# EAGLE board marquee (EAGLE 9.3.0)
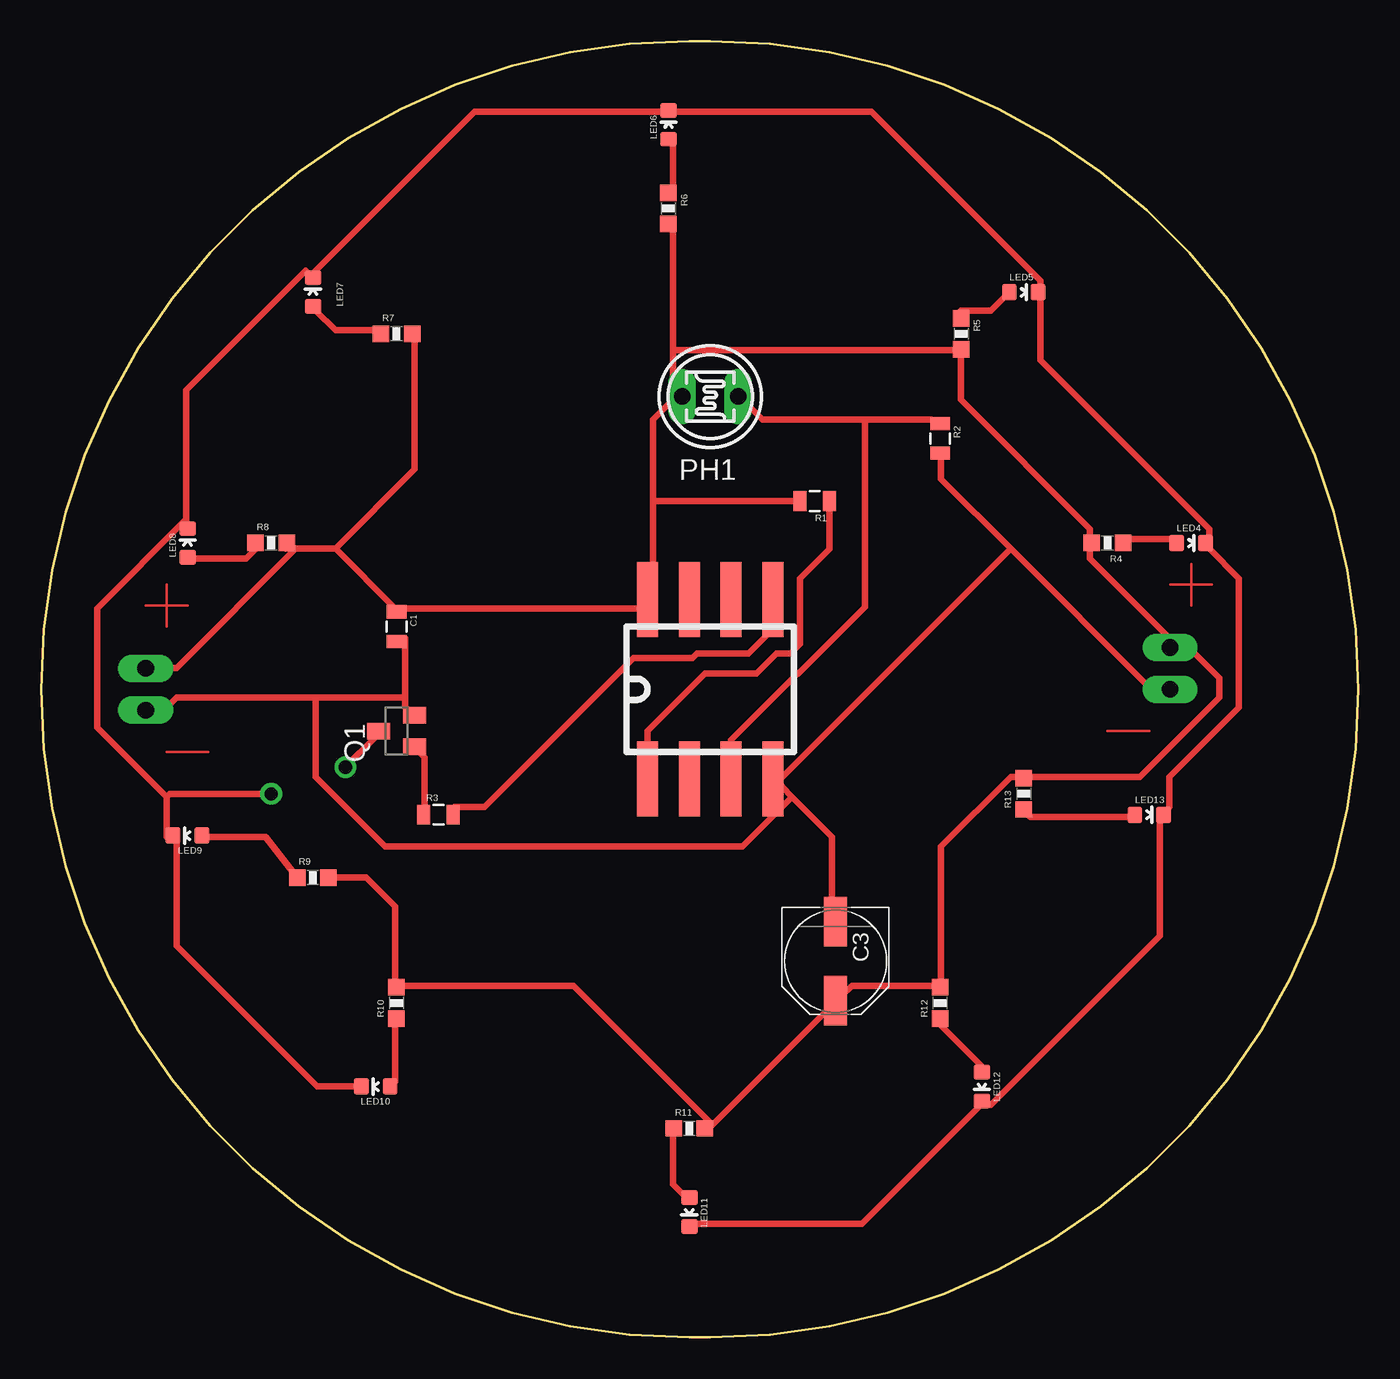
[diagram p0: board, top side]
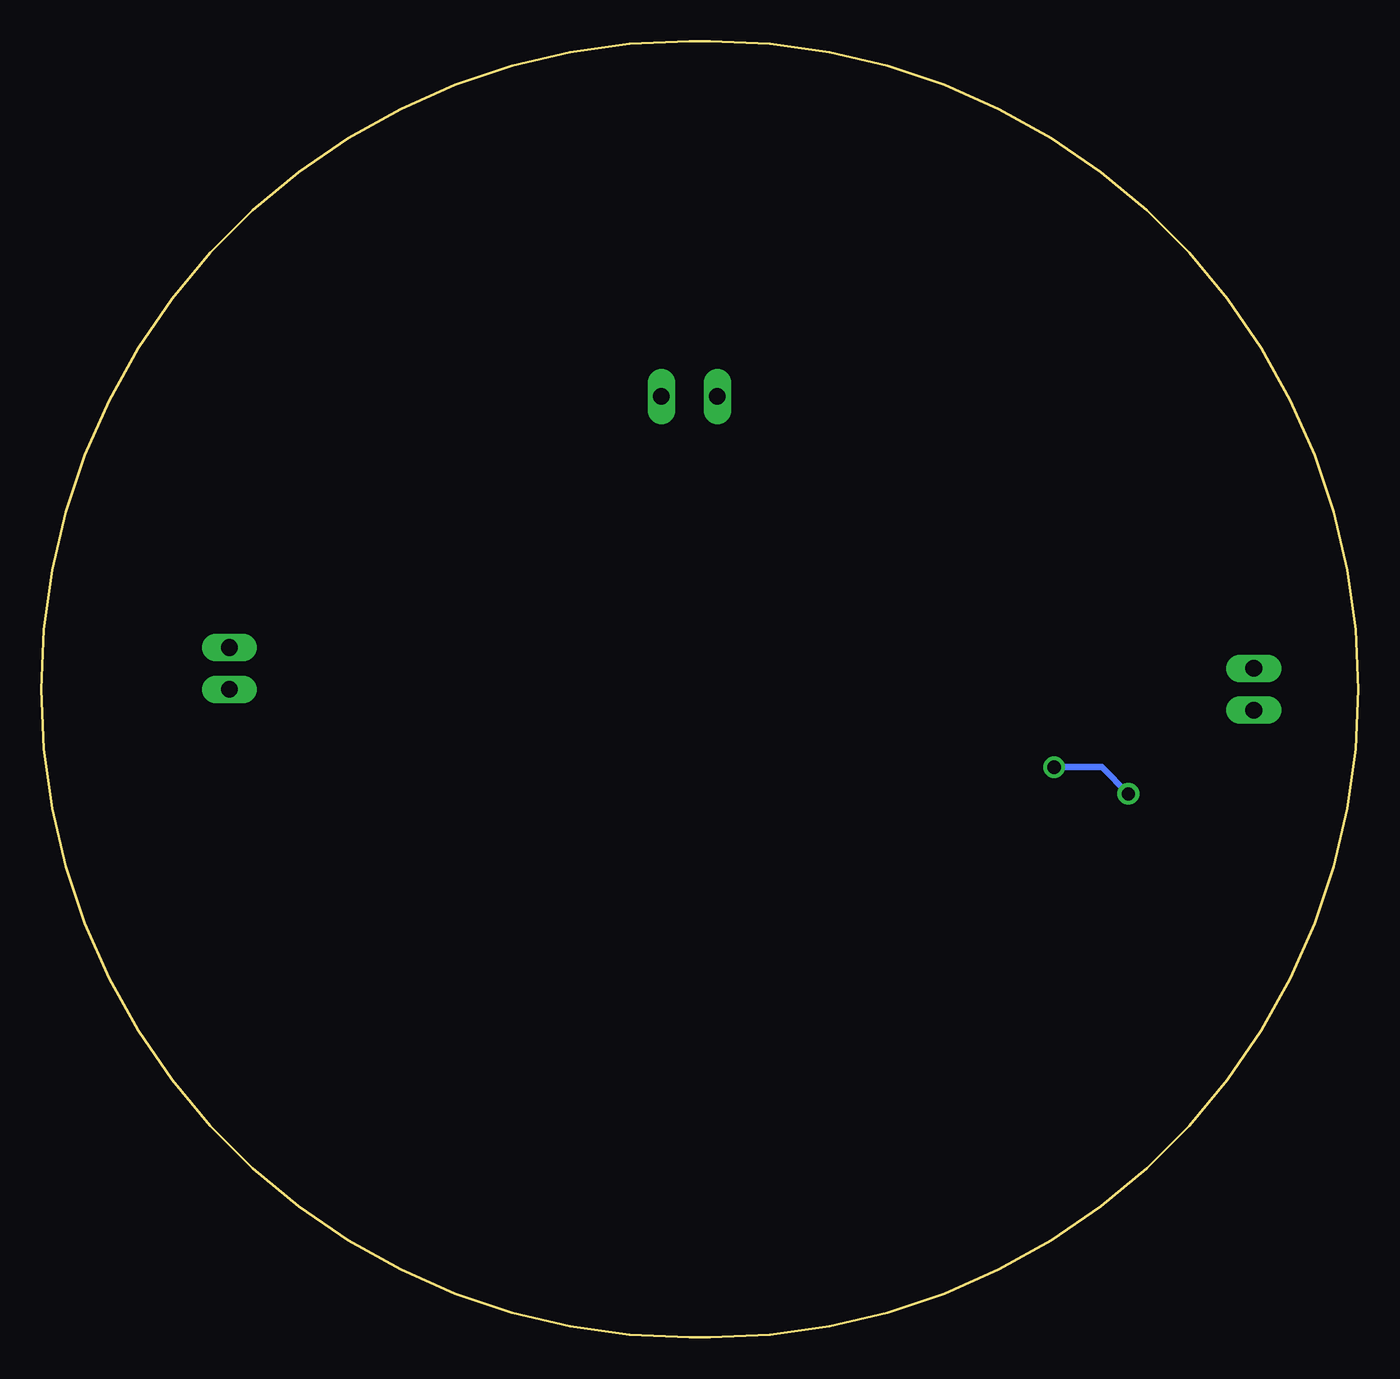
[diagram p1: board, bottom side, seen from below]

Size 80.01 x 78.74 mm. Coordinates in mm from the lower left corner, seen from the top.
Outline: 0,39.37 arc-90 39.37,78.74 40.64,78.74 arc-90 80.01,39.37 arc-90 40.64,0 39.37,0 arc-90 0,39.37
Copper layers (1*16): Top 0.035mm / dielectric 1.5mm / Bottom 0.035mm
Design rules "default": minimum track width 16mil, minimum drill 0.8mm, track to track 0.8mm, track to pad 0.8mm, pad to pad 0.8mm, via to via 0.8mm, smd to smd 0mil, copper to edge 1mil, drill to drill 1mil, minimum pad ring 10mil, minimum via ring 10mil, stop-mask expansion 1mil, vias tented up to drill 30mil, thermal gap 10mil

## Footprints (pad centres in the part's own frame; a part is rotated, then mirrored left to right if it is on the bottom)
0805 = smd 0.8 x 1.2: 1 -0.9,0; 2 0.9,0
PANASONIC_D = smd 3 x 1.4: + 2.4,0; - -2.4,0
LED-0603 = smd 1 x 0.9: A 0,-0.877; C 0,0.877
PHOTOCELL_ADAFRUIT = drill 1 pad 1.676 long: 1 -1.7,0; 2 1.7,0
SOT23 = smd 1 x 1.4: 1 -0.95,-1.1; 2 0.95,-1.1; 3 0,1.1
0603-RES = smd 1 x 1: 1 -0.95,0; 2 0.95,0
SOCKET-8PIN-BENT = smd 4.54 x 1.27: 1 -5.445,3.81; 2 -5.445,1.27; 3 -5.445,-1.27; 4 -5.445,-3.81; 5 5.445,-3.81; 6 5.445,-1.27; 7 5.445,1.27; 8 5.445,3.81
HEADER-2 = drill 1.016 pad 1.676 long: 1 0,0; 2 0,2.54

## Placement (x,y rotation side)
C1  0.1uF  [0805]  21.59,43.18 270 top
C3  100uf  [PANASONIC_D]  48.26,22.86 270 top
LED4  [LED-0603]  69.85,48.26 270 top
LED5  [LED-0603]  59.69,63.5 270 top
LED6  [LED-0603]  38.1,73.66 0 top
LED7  [LED-0603]  16.51,63.5 0 top
LED8  [LED-0603]  8.89,48.26 0 top
LED9  [LED-0603]  8.89,30.48 90 top
LED10  [LED-0603]  20.32,15.24 90 top
LED11  [LED-0603]  39.37,7.62 180 top
LED12  [LED-0603]  57.15,15.24 180 top
LED13  [LED-0603]  67.31,31.75 270 top
PH1  PHOTOCELL  [PHOTOCELL_ADAFRUIT]  40.64,57.15 0 top
Q1  [SOT23]  21.59,36.83 90 top
R1  10k  [0805]  46.99,50.8 180 top
R2  10k  [0805]  54.61,54.61 270 top
R3  150  [0805]  24.13,31.75 0 top
R4  150  [0603-RES]  64.77,48.26 180 top
R5  150  [0603-RES]  55.88,60.96 270 top
R6  150  [0603-RES]  38.1,68.58 270 top
R7  150  [0603-RES]  21.59,60.96 0 top
R8  150  [0603-RES]  13.97,48.26 0 top
R9  150  [0603-RES]  16.51,27.94 0 top
R10  150  [0603-RES]  21.59,20.32 90 top
R11  150  [0603-RES]  39.37,12.7 0 top
R12  150  [0603-RES]  54.61,20.32 90 top
R13  150  [0603-RES]  59.69,33.02 90 top
U$1  ATTINY85-SOCKET-BENT  [SOCKET-8PIN-BENT]  40.64,39.37 90 top
U$2  HEADER-2  [HEADER-2]  68.58,39.37 0 top
U$3  HEADER-2  [HEADER-2]  6.35,38.1 0 top

## Library data of the parts
C1 C3 LED4-LED13 PH1 Q1 R1-R13 U$1-U$3 = homemade-hardware

## Nets
5V: C1.1 C3.+ PH1.1 R1.2 R4.2 R5.2 R6.2 R7.2 R8.2 R9.2 R10.2 R11.2 R12.2 R13.2 U$1.8 U$2.2 U$3.2
GND: C1.2 C3.- Q1.2 R2.2 U$1.4 U$2.1 U$3.1
GND_LED: LED4.C LED5.C LED6.C LED7.C LED8.C LED9.C LED10.C LED11.C LED12.C LED13.C Q1.3
N$1: LED4.A R4.1
N$2: Q1.1 R3.1
N$3: R3.2 U$1.5
N$7: LED5.A R5.1
N$8: LED6.A R6.1
N$9: LED7.A R7.1
N$10: LED8.A R8.1
N$11: LED9.A R9.1
N$12: LED10.A R10.1
N$13: LED11.A R11.1
N$14: LED12.A R12.1
N$15: LED13.A R13.1
RESET: R1.1 U$1.1
SENSOR: PH1.2 R2.1 U$1.3

## Tracks (layer width: path | path; a pad name or v marks a point on that pad's centre or on a via)
5V
  Top 0.406: 21.49,21.37 21.49,26.19 19.74,27.94 R9.2 | 40.79,12.92 48.03,20.16 C3.+ 48.64,20.76 49.24,21.37 54.67,21.37 | 54.67,21.37 54.67,29.81 58.89,34.03 59.49,34.03 R13.2 60.1,34.03 66.73,34.03 71.56,38.86 71.56,40.07 69.14,42.48 U$2.2 68.54,42.48 63.72,47.3 63.72,47.91 R4.2 63.72,48.51 63.72,49.11 55.87,56.95 55.87,59.97 | 54.67,21.37 R12.2 | 21.49,21.37 32.35,21.37 40.79,12.92 | 21.49,21.37 R10.2 | 40.79,12.92 R11.2 | 17.87,47.91 15.46,47.91 | 15.46,47.91 14.86,47.91 R8.2 | 17.87,47.91 21.49,44.29 C1.1 22.09,44.29 36.57,44.29 U$1.8 37.17,44.89 37.17,50.8 | 17.87,47.91 22.7,52.73 22.7,60.57 R7.2 | 15.46,47.91 8.22,40.67 6.41,40.67 U$3.2 | 38.38,59.97 38.38,57.56 PH1.1 38.38,56.95 37.17,55.75 37.17,50.8 | 38.38,59.97 38.38,67.21 R6.2 | 38.38,59.97 55.87,59.97 | 55.87,59.97 R5.2 | R1.2 37.17,50.8
  Bottom 0.406: 38.38,56.95 PH1.1
GND
  Top 0.406: 22.09,38.86 22.09,38.26 Q1.2 | 22.09,38.86 22.09,42.48 C1.2 | 16.67,38.86 8.22,38.86 7.62,38.26 6.41,38.26 U$3.1 | 16.67,38.86 22.09,38.86 | 45.62,32.83 45.02,33.43 U$1.4 45.02,34.03 58.89,47.91 | 45.62,32.83 48.03,30.41 48.03,25.59 C3.- | 58.89,47.91 67.33,39.46 68.54,39.46 U$2.1 | 58.89,47.91 54.67,52.13 54.67,53.34 R2.2 | 16.67,38.86 16.67,34.03 20.89,29.81 42.6,29.81 45.62,32.83
GND_LED  (via drill 0.8)
  Top 0.406: 57.08,14.13 49.84,6.89 39.59,6.89 LED11.C | 60.7,63.59 60.7,59.37 70.95,49.11 70.95,48.51 LED4.C 70.95,47.91 72.76,46.1 72.76,38.26 68.54,34.03 68.54,32.22 LED13.C 67.94,31.62 67.94,24.38 57.68,14.13 57.08,14.13 | 57.08,14.13 LED12.C | v18.48,34.64 20.29,36.45 Q1.3 | 8.82,49.72 8.82,57.56 16.06,64.8 LED7.C 16.67,64.8 26.32,74.45 37.78,74.45 LED6.C 38.38,74.45 50.44,74.45 60.7,64.19 60.7,63.59 | 8.82,49.72 8.82,49.11 LED8.C | 7.62,32.83 7.62,30.41 LED9.C 8.22,30.41 8.22,23.78 16.76,15.24 LED10.C | 7.62,32.83 3.4,37.05 3.4,44.29 8.82,49.72 | 60.7,63.59 LED5.C | 7.62,32.83 7.81,33.02 v13.97,33.02
  Bottom 0.406: v13.97,33.02 15.59,34.64 v18.48,34.64
N$1
  Top 0.406: R4.1 66.13,48.51 68.54,48.51 LED4.A
N$2
  Top 0.406: R3.1 23.3,32.22 23.3,35.24 22.7,35.84 Q1.1
N$3
  Top 0.406: R3.2 25.11,32.22 26.92,32.22 35.97,41.27 39.57,41.27 39.84,41.54 42.96,41.54 44.41,42.99 44.41,44.29 U$1.5
N$4
  Top 0.152: 7.62,45.72 7.62,43.18
N$5
  Top 0.152: 6.35,44.45 8.89,44.45
N$6
  Top 0.152: 7.62,35.56 10.16,35.56
N$7
  Top 0.406: R5.1 55.87,62.38 57.68,62.38 58.89,63.59 LED5.A
N$8
  Top 0.406: R6.1 38.38,69.62 38.38,72.64 LED6.A
N$9
  Top 0.406: R7.1 20.29,61.18 17.87,61.18 16.67,62.38 LED7.A
N$10
  Top 0.406: LED8.A 8.82,47.3 12.44,47.3 13.05,47.91 R8.1
N$11
  Top 0.406: LED9.A 10.03,30.41 13.65,30.41 R9.1
N$12
  Top 0.406: R10.1 21.49,18.95 21.49,15.54 LED10.A
N$13
  Top 0.406: R11.1 38.38,12.32 38.38,9.3 38.98,8.7 LED11.A
N$14
  Top 0.406: R12.1 54.67,18.95 57.08,16.54 LED12.A
N$15
  Top 0.406: LED13.A 66.13,31.62 60.1,31.62 R13.1
N$16
  Top 0.152: 69.85,46.99 69.85,44.45
N$17
  Top 0.152: 68.58,45.72 71.12,45.72
N$18
  Top 0.152: 64.77,36.83 67.31,36.83
RESET
  Top 0.406: U$1.1 36.83,36.83 40.33,40.34 43.46,40.34 44.67,41.54 45.5,41.54 46.09,42.13 46.09,46.09 47.89,47.89 R1.1
SENSOR
  Top 0.406: 50.03,55.75 43.81,55.75 42.6,56.95 PH1.2 | 50.03,55.75 54.06,55.75 R2.1 | U$1.3 41.91,36.29 45.95,40.34 46,40.34 50.03,44.37 50.03,55.75